# Altium PCB PCB1.PcbDoc
Units mil, origin at the board's own origin, x right, y up, seen from the top; angles counter-clockwise.
Board outline 3935 x 3935 mil, 2 copper layers (Top Layer, Bottom Layer); 30 components, 16 nets, 99 pads, 0 vias.
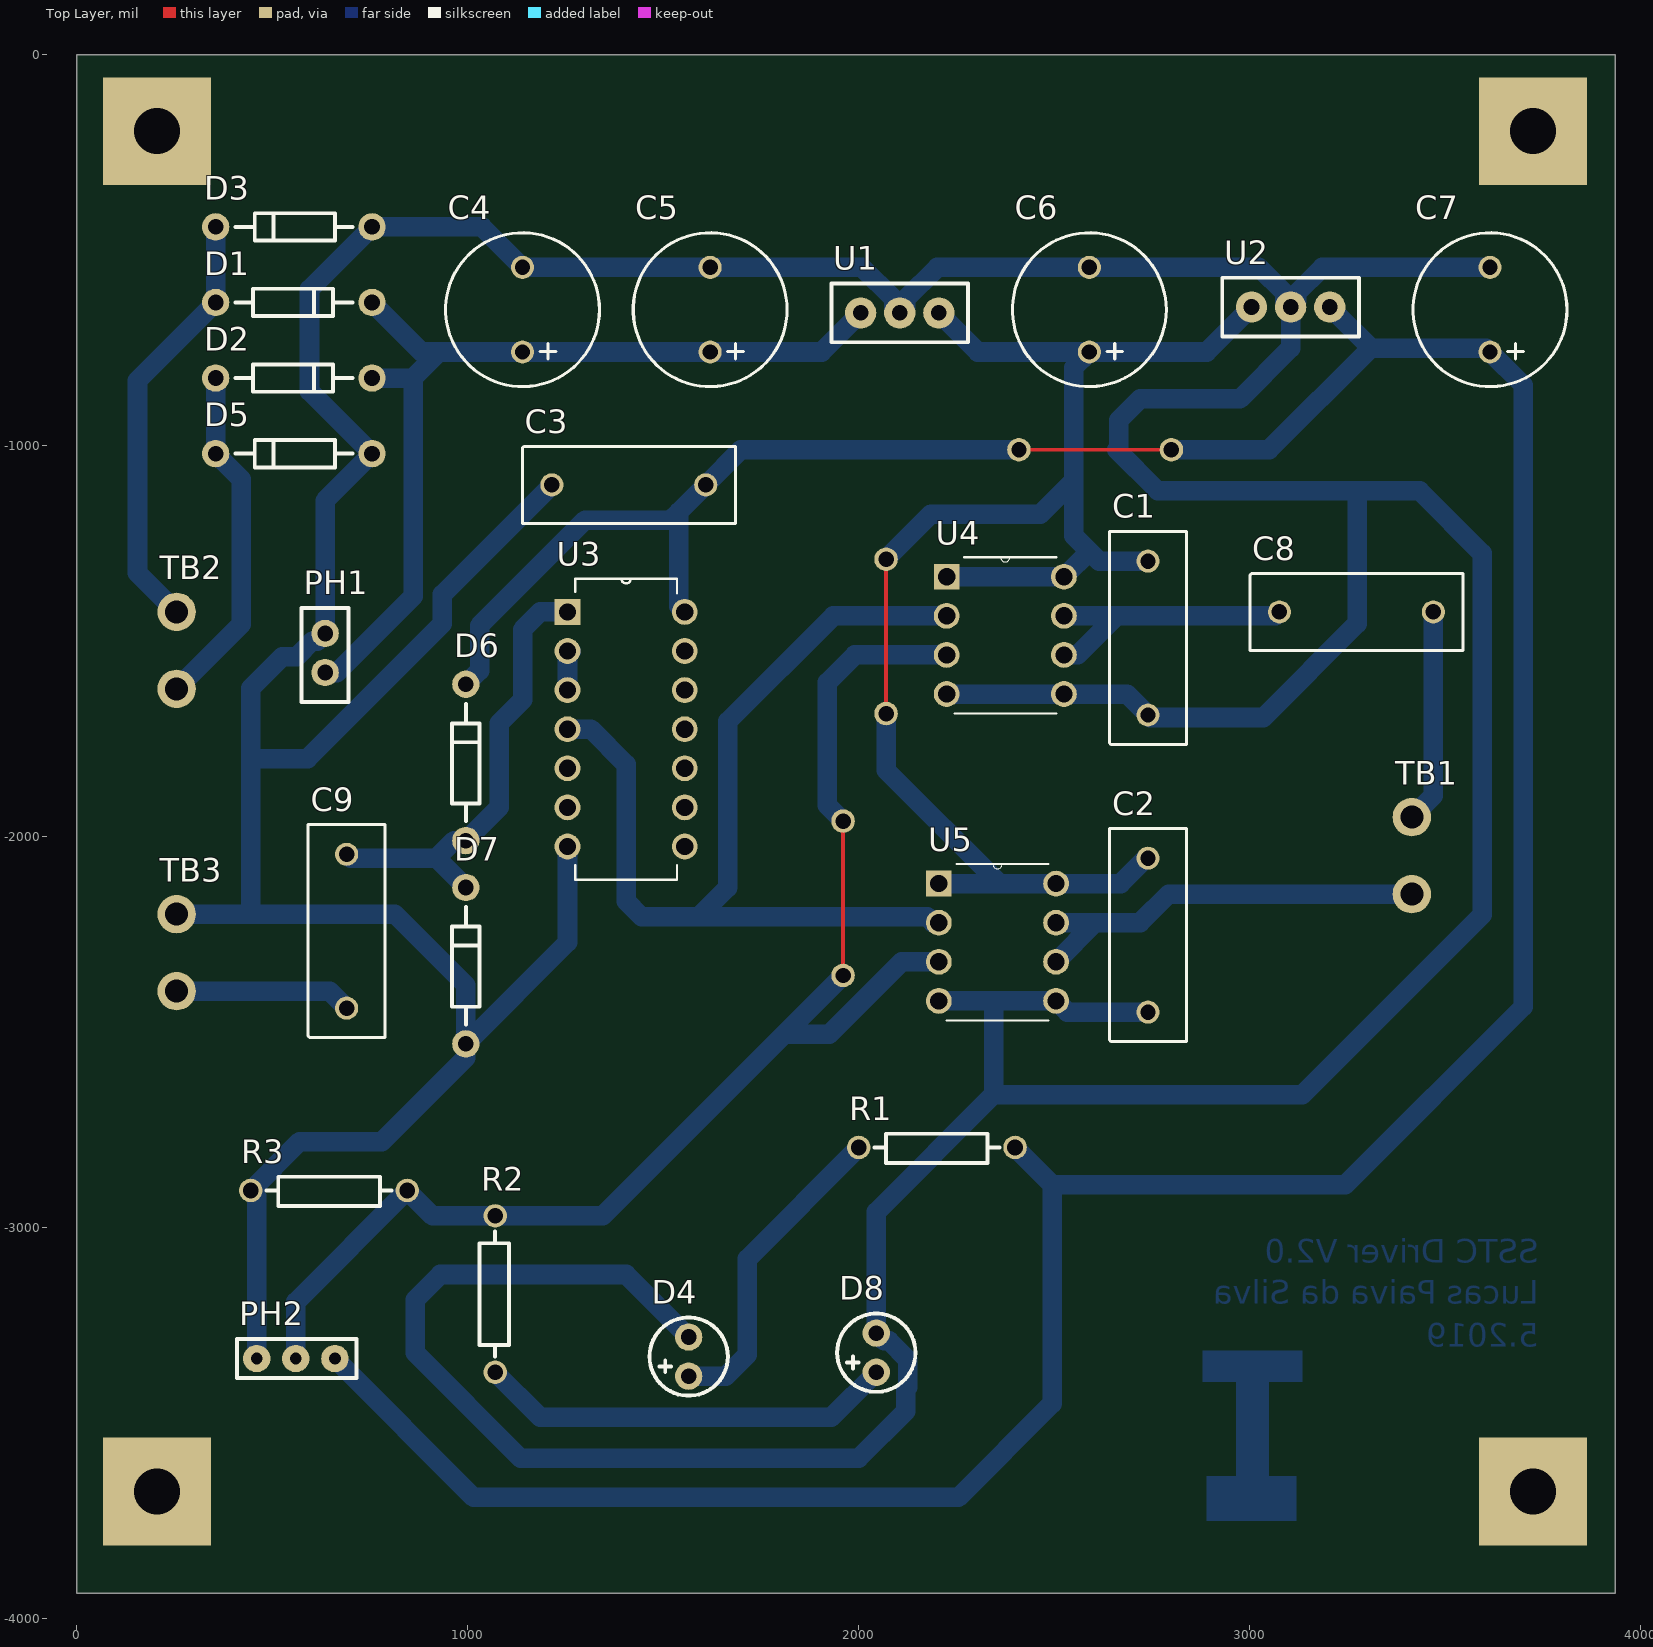
[diagram p0: Top Layer view]
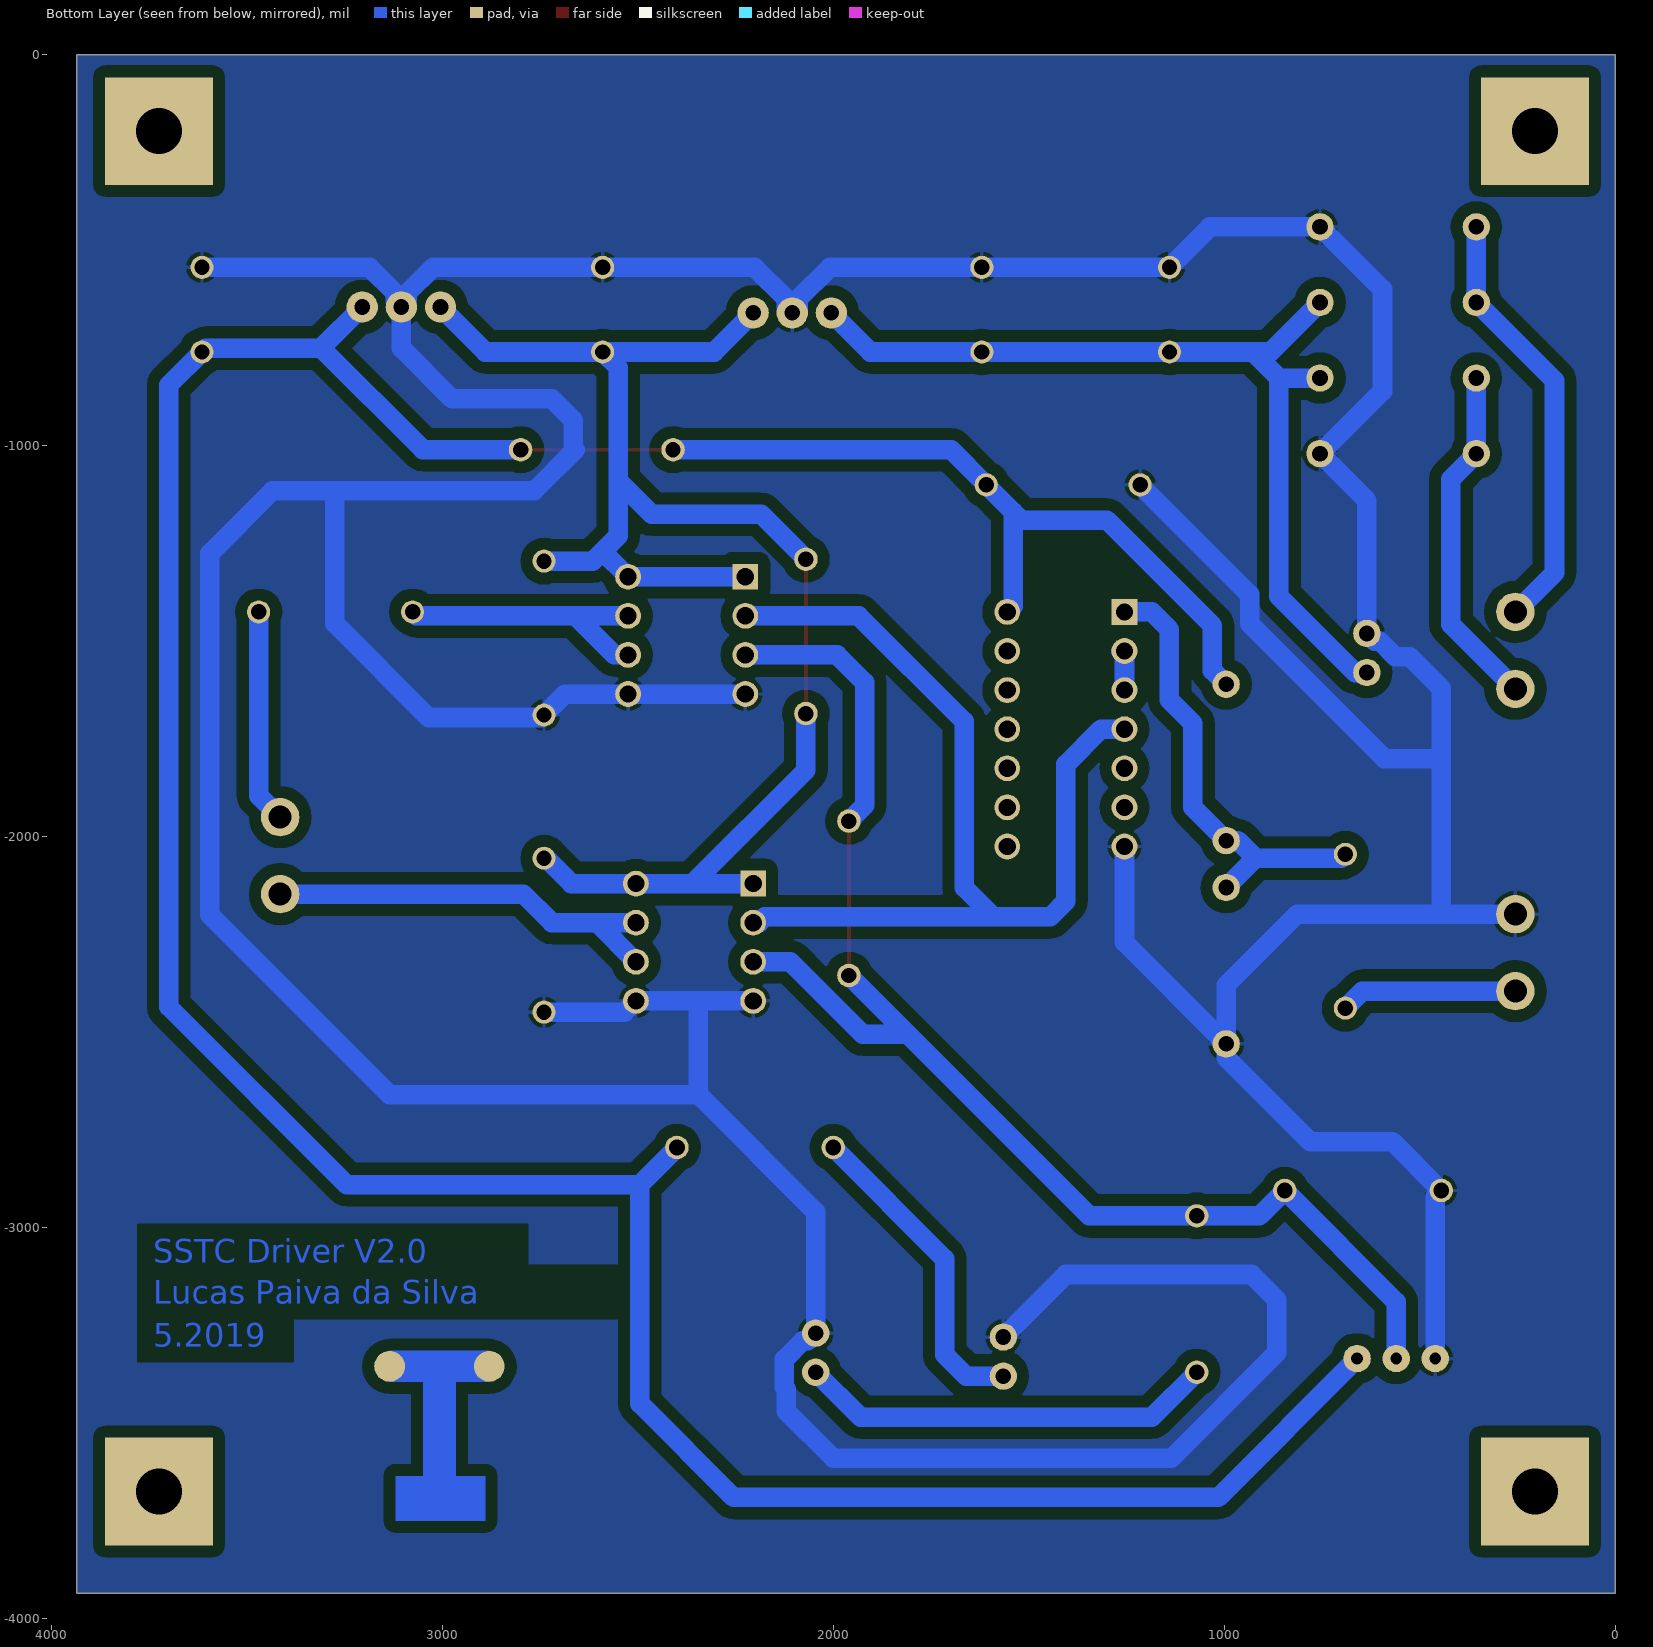
[diagram p1: Bottom Layer view, seen from below]

## Layer stack, top to bottom
Top Solder: solder mask 0.4, Solder Resist, Dk 3.5
Top Layer: signal copper 1.4
Dielectric 1: dielectric 12.6, FR-4, Dk 4.8
Bottom Layer: signal copper 1.4
Bottom Solder: solder mask 0.4, Solder Resist, Dk 3.5

## Board outline
0,-3935 3935,-3935 3935,0 0,0

## Design rules (kind name [scope] priority, off if disabled: settings)
Clearance [All] p1: gap=20 ignorepadtopadclearanceinfootprint=FALSE
PolygonConnect [All] p1: connectstyle=Relief reliefconductorwidth=10 reliefentries=4 polygonreliefangle="90 Angle" airgapwidth=10
RoutingVias [All] p1: holewidth=28 width=50 viastyle="Through Hole" minholewidth=28 minwidth=50 maxholewidth=28 maxwidth=50
SolderMaskExpansion [All] p1: expansion=4
Width [All] p1: maxlimit=100 minlimit=10 preferedwidth=50 toplayer_maxwidth=10 toplayer_prefwidth=10 bottomlayer_minwidth=30 minimp=50.000000 maximp=50.000000 favimp=50.000000
30 further rules are at their usual default settings.

## Components (designator, comment, footprint, x,y, rotation, side; value= is the part's Value field where it differs from the comment)
C1 "Capacitor 100n 250V (Verniz)" "Capacitor 100n (cor verniz)" 2740,-1688.7 r90 top
C2 "Capacitor 100n 250V (Verniz)" "Capacitor 100n (cor verniz)" 2740,-2448.7 r90 top
C3 "Capacitor 100n 250V (Verniz)" "Capacitor 100n (cor verniz)" 1215,-1100 r0 top
C4 "1000uf 25V" "Capacitor 1000u 25V" 1140,-543.46 r270 top
C5 "1000uf 25V" "Capacitor 1000u 25V" 1620,-543.46 r270 top
C6 "1000uf 25V" "Capacitor 1000u 25V" 2590,-543.46 r270 top
C7 "1000uf 25V" "Capacitor 1000u 25V" 3615,-543.46 r270 top
C8 "100n 250V" "Capacitor 100n (cor verniz)" 3076.3,-1425 r0 top
C9 "100n 250V" "Capacitor 100n (cor verniz)" 690,-2438.7 r90 top
D1 "Diode 1N4004" "Diode 0.4" 355,-633.33 r0 top
D2 "Diode 1N4004" "Diode 0.4" 355,-826.67 r0 top
D3 "Diode 1N4004" "Diode 0.4" 755,-440 r180 top
D4 "LED PTH" "LED PTH" 1565,-3380 r90 top
D5 "Diode 1N4004" "Diode 0.4" 755,-1020 r180 top
D6 "Diode 1N60" "Diode 0.4" 995,-2010 r90 top
D7 "Diode 1N60" "Diode 0.4" 995,-2530 r90 top
D8 "LED PTH" "LED PTH" 2045,-3370 r90 top
PH1 "PinHead2" PinHead2 635,-1580 r90 top
PH2 "PinHead3" PINHEAD3 460,-3335 r0 top
R1 "Resistor 0.4" "Resistor Axial 0.4" 2000,-2795 r0 top
R2 "Resistor 0.4" "Resistor Axial 0.4" 1070,-2970 r270 top
R3 "Resistor 0.4" "Resistor Axial 0.4" 445,-2905 r0 top
TB1 "TBlock" TBlock 3415,-1950 r270 top
TB2 "TBlock" TBlock 255,-1621.85 r90 top
TB3 "TBlock" TBlock 255,-2198.15 r270 top
U1 "LM78XX" LM317/337 2010,-660 r0 top
U2 "LM78XX" LM317/337 3010,-645 r0 top
U3 "74HC14" 74HC14 1255,-1425 r0 top
U4 "UCC37322" UCC37322/21 2225,-1335 r0 top
U5 "UCC37321" UCC37322/21 2205,-2120 r0 top

## Footprints (in the part's own frame and the unit in brackets; to place one, negate y for a bottom-side part, rotate by r counter-clockwise, add the part's x,y. Pads: shape width x height; smd on the part's side, far side on the other; paste and mask are expansions set on the pad)
74HC14 [mil]
  rect 66x66 hole 44: 1(0,0)
  round 66 hole 44: 2(0,-100) 3(0,-200) 4(0,-300) 5(0,-400) 6(0,-500) 7(0,-600) 8(300,-600) 9(300,-500) 10(300,-400) 11(300,-300) 12(300,-200) 13(300,-100) 14(300,0)
  silkscreen extent 20,-685 280,85
"Capacitor 100n (cor verniz)" [mm]
  round 1.5 hole 1: 1(0,0) 2(10,0)
  silkscreen extent -1.91,-2.5 11.94,2.5
"Capacitor 1000u 25V" [mm]
  round 1.5 hole 1: 1(0,0) 2(5.5,0)
  silkscreen extent -2.25,-5 7.75,5
"Diode 0.4" [mil]
  round 70 hole 40: A(0,0) K(400,0)
  silkscreen extent 50,-35 350,35
"LED PTH" [mil]
  round 70 hole 40: 1(0,0) 2(100,0)
  silkscreen extent -50,-100 150,100
LM317/337 [mil]
  round 80 hole 40: 1(-5,0) 2(95,0) 3(195,0)
  silkscreen extent -80,-75 270,75
PinHead2 [mil]
  round 70 hole 40: 1(0,0) 2(100,0)
  silkscreen extent -75,-60 165,60
PINHEAD3 [mil]
  round 70 hole 30: 1(0,0) 2(100,0) 3(200,0)
  silkscreen extent -50,-50 255,50
"Resistor Axial 0.4" [mil]
  round 60 hole 40: 1(0,0) 2(400,0)
  silkscreen extent 40,-40 360,35
TBlock [mm]
  round 2.5 hole 1.5: 1(0,0) 2(5,0)
UCC37322/21 [mil]
  rect 66x66 hole 44: 1(0,0)
  round 66 hole 44: 2(0,-100) 3(0,-200) 4(0,-300) 5(300,-300) 6(300,-200) 7(300,-100) 8(300,0)
  silkscreen extent 20,-350 280,50

## Part data
C4 C5 C6 C7: library part "Capacitor 1000uf 25V"
C8 C9: library part "Capacitor 100n 250V (Verniz)"
D6 D7: library part "Diode 1N4004"

## Free pads (board coordinates)
  round 78.74 smd far side: 5(2880,-3355) 6(3135,-3355)
  rect 275.59x275.59 hole 118.11: 7(205,-3675) 7(205,-195) 7(3725,-3675) 7(3725,-195)
  round 60 hole 39.37: J1(2410,-1010) J1(2800,-1010) J2(1960,-2355) J2(1960,-1960) J3(2070,-1685) J3(2070,-1290)

## Nets (pads, with @x,y where several pads share a name; then routed paths per layer and width w, separated by ;. In a path a pad name is that pad's centre, name@x,y a point inside that pad or via, vN(x,y) a via of type N, cw(c..) or ccw(c..) an arc to the next point about the centre after c; other vN are vias at no path point)
1Y/2A: U3.2 U3.3 | length 110
  Bottom Layer w50: U3.3 U3.2 U3.2@1265,-1525
5V: C3.2 C7.2 D6.K pad.J1 PH2.3 R1.2 U2.3 U3.14 | length 9338.2
  Top Layer w10: pad.J1@2410,-1010 pad.J1@2800,-1010
  Bottom Layer w50: PH2.3 1015,-3690 2255,-3690 2495,-3450 2495,-2890 ; D6.K 1030,-1575 1030,-1460 1300,-1190 1518.7,-1190 1540,-1168.7 ; U3.14 1540,-1410 1540,-1168.7 ; R1.2 2495,-2890 ; pad.J1@2410,-1010 1698.7,-1010 C3.2 1540,-1168.7 ; pad.J1@2800,-1010 3050,-1010 3310,-750 ; U2.3 3310,-750 ; 2495,-2890 3245,-2890 3700,-2435 3700,-845 C7.2 3605,-750 3310,-750
12V: C1.2 C2.2 C6.2 pad.J3 U1.3 U2.1 U4.1 U4.8 U5.1 U5.8 | length 4054.4
  Top Layer w10: pad.J3@2070,-1685 pad.J3@2070,-1290
  Bottom Layer w50: pad.J3@2070,-1685 2070,-1830 2360,-2120 ; pad.J3@2070,-1290 2185,-1175 2465,-1175 2550,-1090 ; U5.1 2360,-2120 ; U1.3 2305,-760 C6.2 ; U4.1 U4.8 2590,-1270 ; C2.2@2735,-2055 2670,-2120 U5.8 2360,-2120 ; C1.2 2615,-1295 2590,-1270 ; U2.1 2890,-760 C6.2 ; 2550,-1090 2550,-1230 2590,-1270 ; 2550,-1090 2550,-800 C6.2
FeedBack: U3.4 U4.2 U5.2 | length 2563
  Bottom Layer w50: U3.4 1315,-1725 1405,-1815 1405,-2165 1445,-2205 1590,-2205 ; U5.2 2190,-2220 2175,-2205 1590,-2205 ; U4.2 1935,-1435 1665,-1705 1665,-2130 1590,-2205
GND: C1.1 C2.1 C3.1 C4.1 C5.1 C6.1 C7.1 D3.A D4.2 D5.A D7.A D8.2 PH1.2 PH2.1 R3.1 TB3.1 U1.2 U2.2 U3.7 U4.4 U4.5 U5.4 U5.5 | length 18756.5
  Bottom Layer w50: TB3.1 430,-2198.15 ; PH2.1 460,-2920 R3.1 570,-2780 780,-2780 995,-2565 D7.A ; C3.1 935,-1380 935,-1455 590,-1800 445,-1800 ; U3.7 1255,-2270 D7.A ; D4.2 1405,-3120 930,-3120 865,-3185 865,-3320 1135,-3590 2000,-3590 2120,-3470 2120,-3413.14 2125,-3408.14 2125,-3336.86 2078.14,-3290 2065,-3290 D8.2 2045,-2960 2345,-2660 ; U5.4 2345,-2420 ; U4.4 U4.5 2686.3,-1635 C1.1 2746.3,-1695 3035,-1695 3275,-1455 3275,-1115 ; C2.1@2735,-2448.7 2533.7,-2448.7 U5.5 2345,-2420 ; C7.1 3186.33,-543.46 3120,-609.79 3120,-630 U2.2 ; 430,-2198.15 445,-2183.15 445,-1800 ; 430,-2198.15 813.15,-2198.15 995,-2380 D7.A ; 445,-1800 445,-1620 525.78,-1539.22 562.65,-1539.22 601.86,-1500 615,-1500 PH1.2 635,-1140 D5.A 595,-860 595,-600 D3.A 1036.54,-440 C4.1 C5.1 2008.67,-543.46 2090,-624.79 2090,-645 U1.2 2120,-645 2120,-624.79 2201.33,-543.46 C6.1 3023.67,-543.46 3090,-609.79 3090,-630 U2.2 ; 2345,-2660 3135,-2660 3595,-2200 3595,-1275 3435,-1115 3275,-1115 ; 2345,-2660 2345,-2420 ; U2.2 3105,-750 2975,-880 2720,-880 2665,-935 2665,-1005 2660,-1010 2765,-1115 3275,-1115
IntIn: pad.J2 PH2.2 R2.1 R3.2 U4.3 U5.3 | length 3516.9
  Top Layer w10: pad.J2@1960,-2355 pad.J2@1960,-1960
  Bottom Layer w50: PH2.2 560,-3190 R3.2 910,-2970 R2.1 1345,-2970 1810,-2505 ; pad.J2@1960,-2355 1810,-2505 ; pad.J2@1960,-1960 1920,-1920 1920,-1605 1990,-1535 U4.3 ; U5.3 2110,-2320 1925,-2505 1810,-2505
NetC8_1: C8.1 U4.6 U4.7 | length 738.9
  Bottom Layer w50: U4.6 2560,-1535 2660,-1435 ; U4.7@2530,-1440 U4.7 2660,-1435 ; C8.1 3066.3,-1435 2660,-1435
NetC8_2: C8.2 TB1.1 | length 547.8
  Bottom Layer w50: TB1.1 3470,-1895 C8.2
NetC9_1: C9.1 TB3.2 | length 453.1
  Bottom Layer w50: TB3.2 646.3,-2395 C9.1
NetC9_2: C9.2 D6.A D7.K U3.1 | length 1167.5
  Bottom Layer w50: C9.2 700,-2055 920,-2055 ; D7.K 920,-2055 ; U3.1 1185,-1425 1140,-1470 1140,-1650 1080,-1710 1080,-1925 D6.A 965,-2010 920,-2055
NetD1_A: D1.A D3.K TB2.2 | length 1109.3
  Bottom Layer w50: TB2.2 155,-1325 155,-833.33 D1.A D3.K
NetD2_A: D2.A D5.K TB2.1 | length 890.5
  Bottom Layer w50: TB2.1 420,-1456.85 420,-1085 D5.K D2.A
NetD4_1: D4.1 R1.1 | length 820.8
  Bottom Layer w50: D4.1 1660,-3380 1715,-3325 1715,-3080 R1.1
NetD8_1: D8.1 R2.2 | length 1070.3
  Bottom Layer w50: R2.2 1185,-3485 1930,-3485 D8.1
NetTB1_2: TB1.2 U5.6 U5.7 | length 1081.7
  Bottom Layer w50: U5.6 2605,-2220 ; U5.7 2605,-2220 ; TB1.2 2793.15,-2146.85 2720,-2220 2605,-2220
VCC: C4.2 C5.2 D1.K D2.K PH1.1 U1.1 | length 2407.3
  Bottom Layer w50: PH1.1 665,-1580 860,-1385 860,-826.67 ; D2.K 860,-826.67 ; D1.K 881.67,-760 926.67,-760 ; U1.1 1905,-760 C5.2 C4.2 926.67,-760 ; 860,-826.67 926.67,-760
pads on no net: U3.5 U3.6 U3.8 U3.9 U3.10 U3.11 U3.12 U3.13

## Polygon pours and split planes (outlines as drawn)
GND on Bottom Layer "Top Layer-No Net" (solid, remove dead copper, pour order 2): 0,0 3935,0 3935,-3935 0,-3935

## Other copper
Bottom Layer:
  rectangle: 2880,-3395 3135,-3315
  rectangle: 2965,-3635 3050,-3395
  rectangle: 2890,-3750 3120,-3635
  text "SSTC Driver V2.0" at 3740,-3090 h60
  text "Lucas Paiva da Silva" at 3740,-3195 h60
  text "5.2019" at 3740,-3305 h60